# Altium PCB bidirectional_audio_v4.1_ASCII.PcbDoc
Units mm, origin at the board's own origin, x right, y up, seen from the top; angles counter-clockwise.
Board outline 43.45 x 78.94 mm, 4 copper layers (Top Layer, Mid-Layer 1, Mid-Layer 2, Bottom Layer), stack 1.458 mm thick; 106 components, 76 nets, 313 pads, 214 vias.
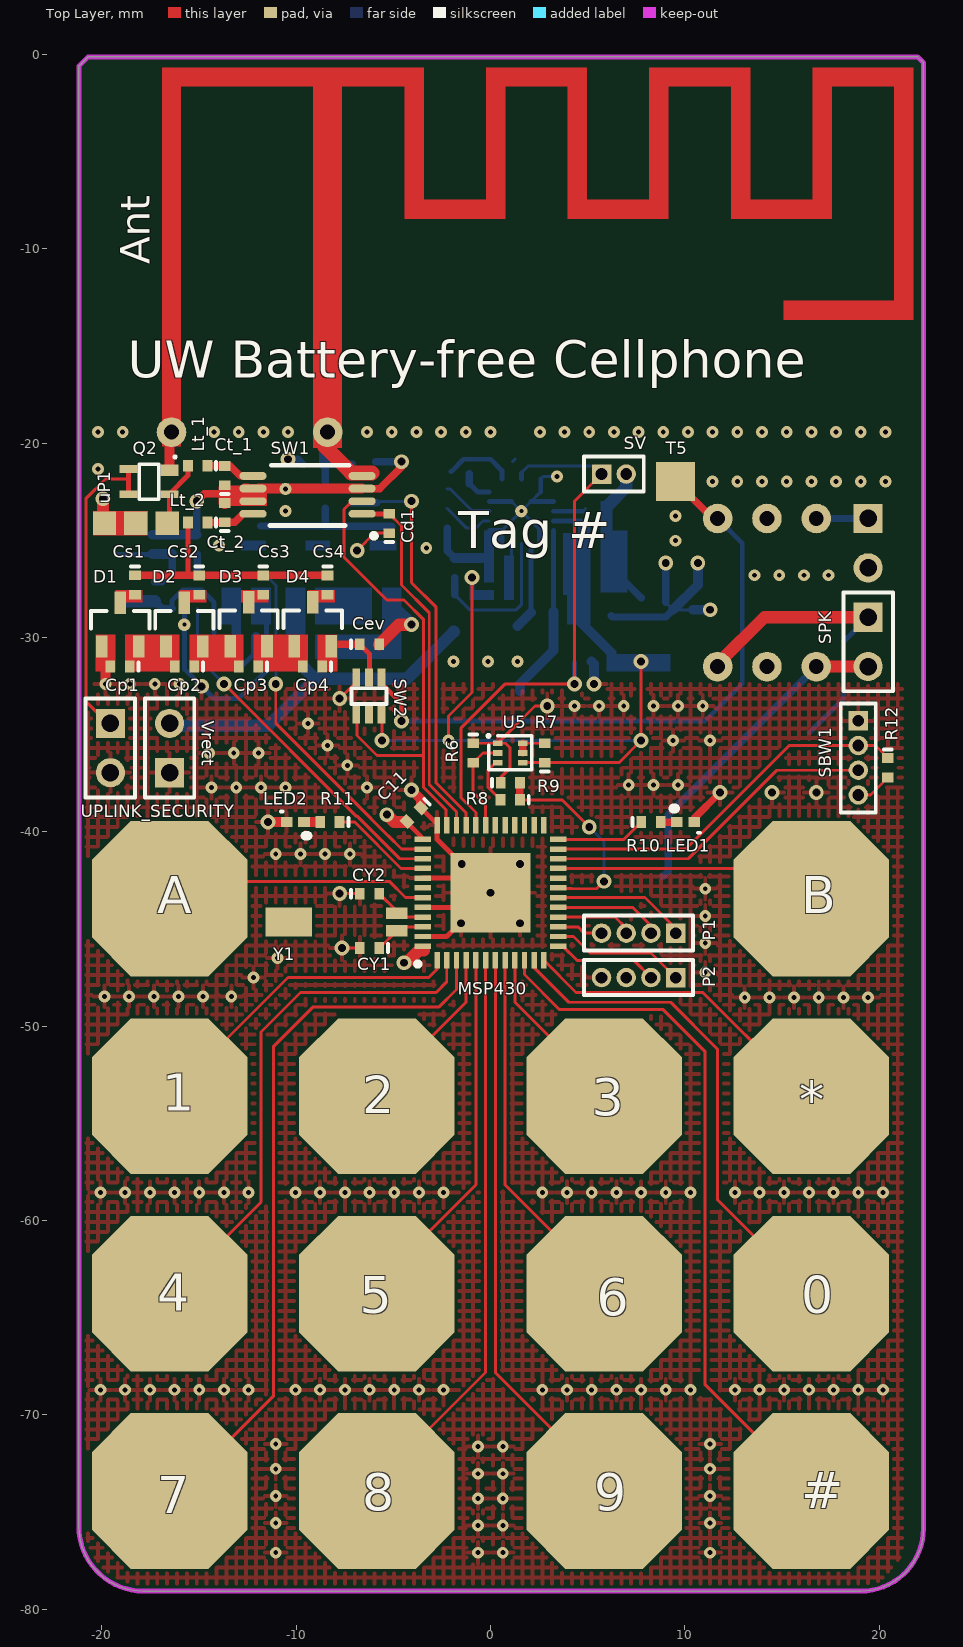
[diagram p0: Top Layer view]
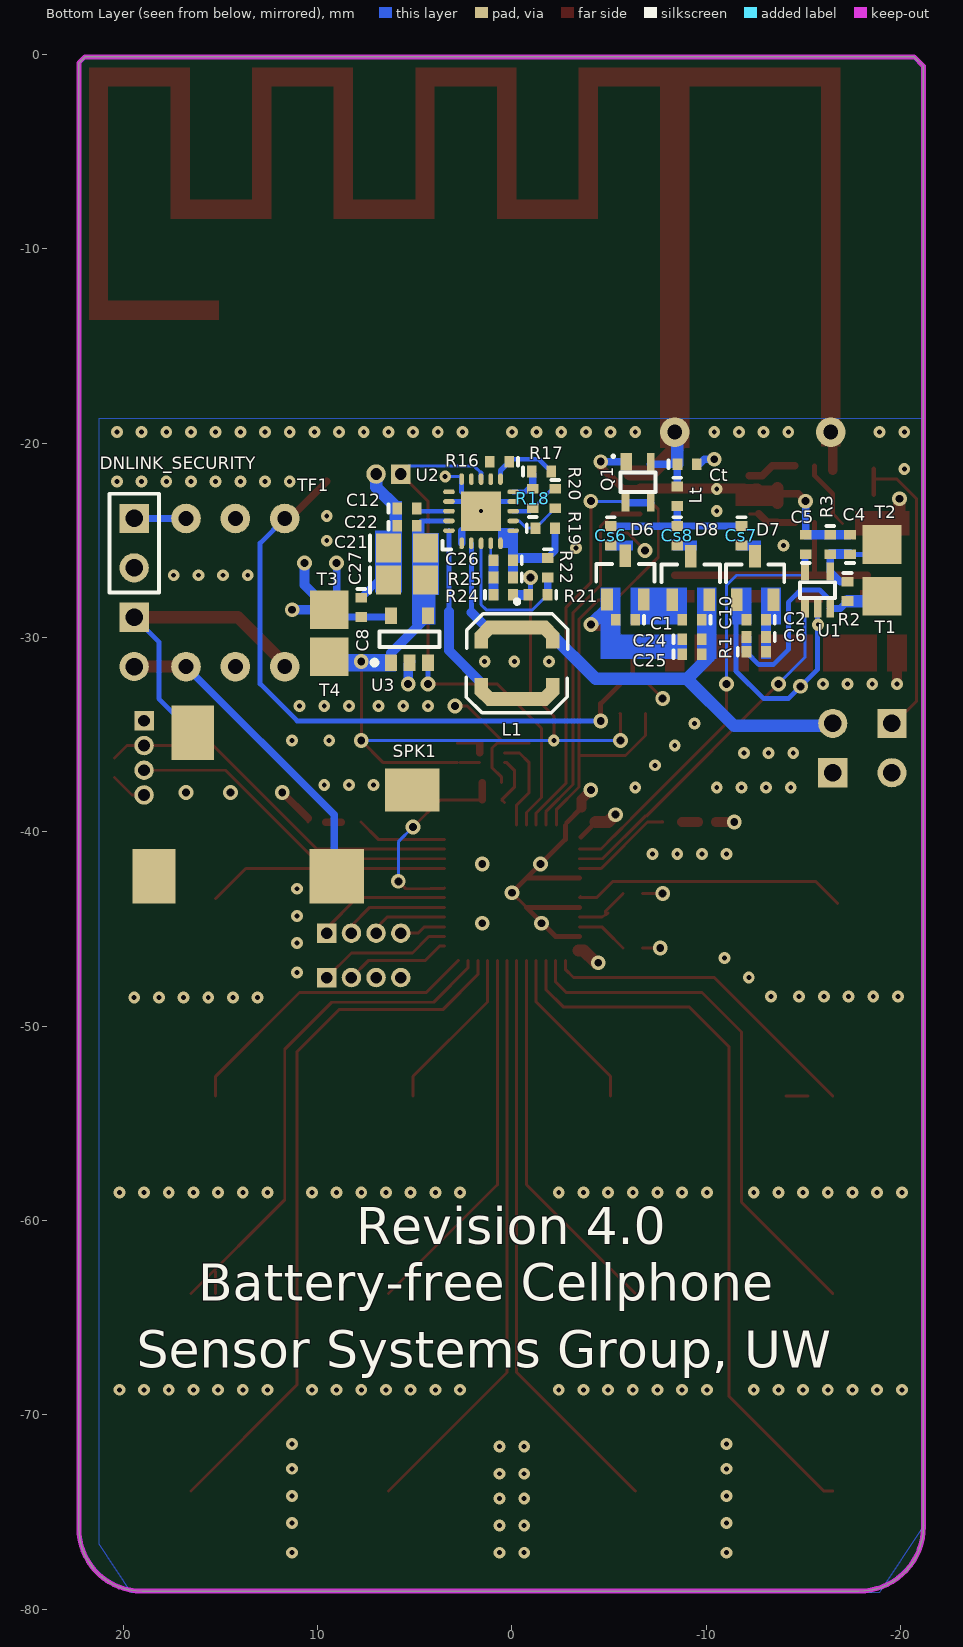
[diagram p1: Bottom Layer view, seen from below]

## Layer stack, top to bottom
Top Layer: signal copper 0.0356
Dielectric: core 0.3023, FR-4, Dk 4.8
Mid-Layer 1: signal copper 0.0356
Dielectric: prepreg 0.7112, FR-4, Dk 4.8
Mid-Layer 2: signal copper 0.0356
Dielectric: core 0.3023, FR-4, Dk 4.8
Bottom Layer: signal copper 0.0356

## Board outline
-21.177,-75.746 -21.177,-0.603 -20.701,-0.127 21.971,-0.127 22.277,-0.433 22.277,-75.838 cw(c19.05,-75.838) 19.05,-79.065 -17.858,-79.065 cw(c-17.858,-75.746)

## Design rules (kind name [scope] priority, off if disabled: settings)
AssemblyTestPointUsage [All] p0: scope1count=1 scope1_0_kind=Board scope1_0_value=Board scope2count=1 scope2_0_kind=Board scope2_0_value=Board commentlength=0
AssemblyTestpoint [All] p0: scope1count=1 scope1_0_kind=Board scope1_0_value=Board scope2count=1 scope2_0_kind=Board scope2_0_value=Board commentlength=0
Clearance "Clearance~Sunstone Circuits" [All] p0: scope1count=1 scope1_0_kind=Board scope1_0_value=Board scope2count=1 scope2_0_kind=Board scope2_0_value=Board commentlength=65 gap=0.152 // Sunstone Circuits Minimum Clearance Rule (MLB~4&6 Layer Designs)
Clearance "Clearance~Sunstone Circuits" [All] p1: gap=0.152 // Sunstone Circuits Minimum Clearance Rule (MLB~4&6 Layer Designs)
ComponentClearance [All] p0: scope1count=1 scope1_0_kind=Board scope1_0_value=Board scope2count=1 scope2_0_kind=Board scope2_0_value=Board commentlength=0 gap=0.254 collisioncheckmode=3
DiffPairsRouting [All] p0: scope1count=1 scope1_0_kind=Board scope1_0_value=Board scope2count=1 scope2_0_kind=Board scope2_0_value=Board commentlength=0
FabricationTestPointUsage [All] p0: scope1count=1 scope1_0_kind=Board scope1_0_value=Board scope2count=1 scope2_0_kind=Board scope2_0_value=Board commentlength=0 valid=0 allowmultiple=FALSE
FabricationTestpoint [All] p0: scope1count=1 scope1_0_kind=Board scope1_0_value=Board scope2count=1 scope2_0_kind=Board scope2_0_value=Board commentlength=0 side=3 testpointundercomponent=TRUE minsize=1.016 maxsize=2.54 preferedsize=1.524 minholesize=0 maxholesize=1.016 preferedholesize=0.813 testpointgrid=0.025
FanoutControl Fanout_BGA [All] p0 off: scope1count=1 scope1_0_kind=Board scope1_0_value=Board scope2count=1 scope2_0_kind=Board scope2_0_value=Board commentlength=69 // Protel DXP Scope 1 Expression Was: IsBGA   Fanout_BGA (Default Rule)
FanoutControl Fanout_LCC [All] p0 off: scope1count=1 scope1_0_kind=Board scope1_0_value=Board scope2count=1 scope2_0_kind=Board scope2_0_value=Board commentlength=69 // Protel DXP Scope 1 Expression Was: IsLCC   Fanout_LCC (Default Rule)
FanoutControl Fanout_SOIC [All] p0 off: scope1count=1 scope1_0_kind=Board scope1_0_value=Board scope2count=1 scope2_0_kind=Board scope2_0_value=Board commentlength=71 // Protel DXP Scope 1 Expression Was: IsSOIC   Fanout_SOIC (Default Rule)
FanoutControl Fanout_Small [All] p0 off: scope1count=1 scope1_0_kind=Board scope1_0_value=Board scope2count=1 scope2_0_kind=Board scope2_0_value=Board commentlength=84 // Protel DXP Scope 1 Expression Was: (CompPinCount < 5)   Fanout_Small (Default Rule)
FanoutControl Fanout_Default [All] p0: scope1count=1 scope1_0_kind=Board scope1_0_value=Board scope2count=1 scope2_0_kind=Board scope2_0_value=Board commentlength=30 // Fanout_Default (Default Rule)
Height [All] p0: scope1count=1 scope1_0_kind=Board scope1_0_value=Board scope2count=1 scope2_0_kind=Board scope2_0_value=Board commentlength=0
HoleSize "HoleSize~Sunstone Circuits" [All] p0: scope1count=1 scope1_0_kind=Board scope1_0_value=Board scope2count=1 scope2_0_kind=Board scope2_0_value=Board commentlength=57 absolutevalues=TRUE maxlimit=6.375 minlimit=0.203 maxpercent=80.000 minpercent=20.000 // Sunstone Circuits Hole Size Rule (MLB~4&6 Layer Designs)
HoleSize Testpoint [All] p0: scope1count=1 scope1_0_kind=Board scope1_0_value=Board scope2count=1 scope2_0_kind=Board scope2_0_value=Board commentlength=0 absolutevalues=TRUE maxlimit=2.54 minlimit=0.025 maxpercent=80.000 minpercent=20.000
HoleSize TestPointUsage [All] p0: scope1count=1 scope1_0_kind=Board scope1_0_value=Board scope2count=1 scope2_0_kind=Board scope2_0_value=Board commentlength=0 absolutevalues=TRUE maxlimit=2.54 minlimit=0.025 maxpercent=80.000 minpercent=20.000
HoleSize "HoleSize~Sunstone Circuits" [All] p1: absolutevalues=TRUE maxlimit=6.375 minlimit=0.203 maxpercent=80.000 minpercent=20.000 // Sunstone Circuits Hole Size Rule (MLB~4&6 Layer Designs)
HoleSize Testpoint [All] p2: absolutevalues=TRUE maxlimit=2.54 minlimit=0.025 maxpercent=80.000 minpercent=20.000
HoleSize TestPointUsage [All] p3: absolutevalues=TRUE maxlimit=2.54 minlimit=0.025 maxpercent=80.000 minpercent=20.000
HoleToHoleClearance [All] p0: scope1count=1 scope1_0_kind=Board scope1_0_value=Board scope2count=1 scope2_0_kind=Board scope2_0_value=Board commentlength=0
LayerPairs [All] p0: scope1count=1 scope1_0_kind=Board scope1_0_value=Board scope2count=1 scope2_0_kind=Board scope2_0_value=Board commentlength=0 enforce=TRUE
MinimumAnnularRing "MinimumAnnularRing~Sunstone Circuits" [All] p0: scope1count=1 scope1_0_kind=Board scope1_0_value=Board scope2count=1 scope2_0_kind=Board scope2_0_value=Board commentlength=63 minimumring=0.178 // Sunstone Circuits Minimum Annular Ring (MLB~4&6 Layer Designs)
MinimumAnnularRing "MinimumAnnularRing~Sunstone Circuits" [All] p1: minimumring=0.178 // Sunstone Circuits Minimum Annular Ring (MLB~4&6 Layer Designs)
MinimumSolderMaskSliver [All] p0: scope1count=1 scope1_0_kind=Board scope1_0_value=Board scope2count=1 scope2_0_kind=Board scope2_0_value=Board commentlength=0
MinimumSolderMaskSliver [All] p1: minsoldermaskwidth=0
NetAntennae [All] p0: scope1count=1 scope1_0_kind=Board scope1_0_value=Board scope2count=1 scope2_0_kind=Board scope2_0_value=Board commentlength=0
PasteMaskExpansion [All] p0: scope1count=1 scope1_0_kind=Board scope1_0_value=Board scope2count=1 scope2_0_kind=Board scope2_0_value=Board commentlength=0 expansion=0
PlaneClearance "PlaneClearance~Sunstone Circuits" [All] p0: scope1count=1 scope1_0_kind=Board scope1_0_value=Board scope2count=1 scope2_0_kind=Board scope2_0_value=Board commentlength=69 clearance=0.305 // Sunstone Circuits Power Plane Clearance Rule (MLB~4&6 Layer Designs)
PlaneClearance "PlaneClearance~Sunstone Circuits" [All] p1: clearance=0.305 // Sunstone Circuits Power Plane Clearance Rule (MLB~4&6 Layer Designs)
PlaneConnect "PlaneConnect~Sunstone Circuits" [All] p0: scope1count=1 scope1_0_kind=Board scope1_0_value=Board scope2count=1 scope2_0_kind=Board scope2_0_value=Board commentlength=67 planeconnectstyle=Relief reliefexpansion=0.254 reliefentries=4 reliefconductorwidth=0.203 reliefairgap=0.254 // Sunstone Circuits Power Plane Connect Rule (MLB~4&6 Layer Designs)
PlaneConnect "PlaneConnect~Sunstone Circuits" [All] p1: planeconnectstyle=Relief reliefexpansion=0.254 reliefentries=4 reliefconductorwidth=0.203 reliefairgap=0.254 // Sunstone Circuits Power Plane Connect Rule (MLB~4&6 Layer Designs)
PolygonConnect "PolygonConnect~Sunstone Circuits" [All] p0: scope1count=1 scope1_0_kind=Board scope1_0_value=Board scope2count=1 scope2_0_kind=Board scope2_0_value=Board commentlength=64 connectstyle=Relief reliefconductorwidth=0.203 reliefentries=4 polygonreliefangle="90 Angle" // Sunstone Circuits Polygon Connect Style (MLB~4&6 Layer Designs)
PolygonConnect "PolygonConnect~Sunstone Circuits" [All] p1: connectstyle=Relief reliefconductorwidth=0.203 reliefentries=4 polygonreliefangle="90 Angle" airgapwidth=0.254 // Sunstone Circuits Polygon Connect Style (MLB~4&6 Layer Designs)
RoutingCorners [All] p0: scope1count=1 scope1_0_kind=Board scope1_0_value=Board scope2count=1 scope2_0_kind=Board scope2_0_value=Board commentlength=0 cornerstyle=45-Degree minsetback=2.54 maxsetback=2.54
RoutingLayers [All] p0: scope1count=1 scope1_0_kind=Board scope1_0_value=Board scope2count=1 scope2_0_kind=Board scope2_0_value=Board commentlength=0 top layer=Automatic mid layer 1=Automatic mid layer 2=Automatic bottom layer=Automatic
RoutingPriority [All] p0: scope1count=1 scope1_0_kind=Board scope1_0_value=Board scope2count=1 scope2_0_kind=Board scope2_0_value=Board commentlength=0
RoutingTopology [All] p0: scope1count=1 scope1_0_kind=Board scope1_0_value=Board scope2count=1 scope2_0_kind=Board scope2_0_value=Board commentlength=0 topology=Shortest
RoutingVias "RoutingVias~Sunstone Circuits" [All] p0: scope1count=1 scope1_0_kind=Board scope1_0_value=Board scope2count=1 scope2_0_kind=Board scope2_0_value=Board commentlength=60 holewidth=0.406 width=0.762 viastyle="Through Hole" minholewidth=0.203 minwidth=0.61 maxholewidth=0.508 maxwidth=1.016 // Sunstone Circuits Routing Vias Rule (MLB~4&6 Layer Designs)
RoutingVias "RoutingVias~Sunstone Circuits" [All] p1: holewidth=0.406 width=0.762 viastyle="Through Hole" minholewidth=0.203 minwidth=0.61 maxholewidth=0.508 maxwidth=1.016 // Sunstone Circuits Routing Vias Rule (MLB~4&6 Layer Designs)
ShortCircuit "ShortCircuit~Sunstone Circuits" [All] p0: scope1count=1 scope1_0_kind=Board scope1_0_value=Board scope2count=1 scope2_0_kind=Board scope2_0_value=Board commentlength=74 allowed=FALSE // Sunstone Circuits Short Circuit Rule~Do Not Allow (MLB~4&6 Layer Designs)
ShortCircuit "ShortCircuit~Sunstone Circuits" [All] p1: allowed=FALSE // Sunstone Circuits Short Circuit Rule~Do Not Allow (MLB~4&6 Layer Designs)
SilkToSilkClearance [All] p0: scope1count=1 scope1_0_kind=Board scope1_0_value=Board scope2count=1 scope2_0_kind=Board scope2_0_value=Board commentlength=0
SilkToSilkClearance [All] p1: silktosilkclearance=0.152
SilkToSolderMaskClearance [All] p0 off: scope1count=1 scope1_0_kind=Board scope1_0_value=Board scope2count=1 scope2_0_kind=Board scope2_0_value=Board commentlength=44 // Protel DXP Scope 1 Expression Was: IsPad
SolderMaskExpansion "SolderMaskExpansion~Sunstone Circuits" [All] p0: scope1count=1 scope1_0_kind=Board scope1_0_value=Board scope2count=1 scope2_0_kind=Board scope2_0_value=Board commentlength=69 expansion=0.076 // Sunstone Circuits Solder Mask Expansion Rule (MLB~4&6 Layer Designs)
SolderMaskExpansion "SolderMaskExpansion~Sunstone Circuits" [All] p1: expansion=0.076 // Sunstone Circuits Solder Mask Expansion Rule (MLB~4&6 Layer Designs)
UnRoutedNet [All] p0: scope1count=1 scope1_0_kind=Board scope1_0_value=Board scope2count=1 scope2_0_kind=Board scope2_0_value=Board commentlength=0
ViasUnderSMD "ViasUnderSMD~Sunstone Circuits" [All] p0: scope1count=1 scope1_0_kind=Board scope1_0_value=Board scope2count=1 scope2_0_kind=Board scope2_0_value=Board commentlength=70 allowed=FALSE // Sunstone Circuits Vias Under SMD~Do Not Allow (MLB~4&6 Layer Designs)
ViasUnderSMD "ViasUnderSMD~Sunstone Circuits" [All] p1: allowed=FALSE // Sunstone Circuits Vias Under SMD~Do Not Allow (MLB~4&6 Layer Designs)
Width "Width~Sunstone Circuits" [All] p0: scope1count=1 scope1_0_kind=Board scope1_0_value=Board scope2count=1 scope2_0_kind=Board scope2_0_value=Board commentlength=61 maxlimit=2.54 minlimit=0.152 preferedwidth=0.254 // Sunstone Circuits Minimum Width Rule (MLB~4&6 Layer Designs)
Width "Width~Sunstone Circuits" [All] p1: maxlimit=2.54 minlimit=0.152 preferedwidth=0.254 // Sunstone Circuits Minimum Width Rule (MLB~4&6 Layer Designs)
22 further rules are at their usual default settings.

## Classes and differential pairs
component class bidirectional_audio_v4.0_AFE: Ant C1 C2 C4 C5 C6 C8 C10 C12 C21 C22 C24 C25 C26 C27 Cd1 Cev Cp1 Cp2 Cp3 Cp4 Cs1 Cs2 Cs3 Cs4 Cs6 Cs7 Cs8 Ct Ct_1 Ct_2 D1 D2 D3 D4 D6 D7 D8 DNLINK_SECURITY L1 Lt Lt_1 Lt_2 Q1 Q2 R1 R2 R3 R16 R17 R18 R19 R20 R21 R22 R24 R25 SPK SPK1 SW1 SW2 T1 T2 T3 T4 T5 TF1 U1 U2 U3 uP1 UPLINK_SECURITY Vrect
component class bidirectional_audio_v4.0_Digital: 0 1 2 3 4 5 6 7 8 9 # * A B C11 CY1 CY2 LED1 LED2 MSP430 P1 P2 R6 R7 R8 R9 R10 R11 R12 SBW1 SV U5 Y1

## Components (designator, comment, footprint, x,y, rotation, side; value= is the part's Value field where it differs from the comment)
0 "Cap touch" CAPTOUCH-8mm#1 13.716,-63.754 r90 top
1 "Cap touch" CAPTOUCH-8mm#2 -16.764,-53.594 r90 top
2 "Cap touch" CAPTOUCH-8mm#3 -6.604,-53.594 r90 top
3 "Cap touch" CAPTOUCH-8mm#4 3.556,-53.594 r90 top
4 "Cap touch" CAPTOUCH-8mm#2 -16.764,-63.754 r90 top
5 "Cap touch" CAPTOUCH-8mm#3 -6.604,-63.754 r90 top
6 "Cap touch" CAPTOUCH-8mm#4 3.556,-63.754 r90 top
7 "Cap touch" CAPTOUCH-8mm#2 -16.764,-73.914 r90 top
8 "Cap touch" CAPTOUCH-8mm#3 -6.604,-73.914 r90 top
9 "Cap touch" CAPTOUCH-8mm#5 3.556,-73.914 r0 top
# "Cap touch" CAPTOUCH-8mm#1 13.716,-73.914 r90 top
* "Cap touch" CAPTOUCH-8mm#1 13.716,-53.594 r90 top
A "Cap touch" CAPTOUCH-8mm#6 -12.7,-44.577 r90 top
Ant "ANT" PIFA_915MHZ -7.182,-20.261 r0 top net-tie
B "Cap touch" CAPTOUCH-8mm#7 11.303,-45.593 r90 top
C1 "Cp_rect" 0402 -5.843,-29.083 r0 bottom
C2 "Cdemod_1" 0402 -12.574,-29.083 r0 bottom
C4 "Cdemod_2" 0402 -17.4,-25.214 r90 bottom
C5 "Decap_rx" 0402 -15.114,-25.214 r90 bottom
C6 "Cdemod_3" 0402 -12.574,-29.972 r0 bottom
C8 "Cout_LDO" 0402 7.747,-28.448 r270 bottom
C10 "Cp_rect" 0402 -9.272,-29.083 r0 bottom
C11 "Cdecap_MSP" 0402 -3.937,-39.116 r225 top
C12 "Cbat" 0402 5.394,-23.36 r180 bottom
C21 "Cstore" 0805-W 5.394,-25.392 r180 bottom
C22 "Cstore" 0402 5.394,-24.249 r180 bottom
C24 "Cin_boost1" 0402 -9.272,-30.099 r180 bottom
C25 "Cin_boost2" 0402 -9.272,-30.861 r180 bottom
C26 "Cref" 0402 0.441,-26.027 r0 bottom
C27 "Cstore2" 0805-W 5.394,-27.043 r180 bottom
Cd1 "Decap_SW" 0402 -5.207,-24.13 r90 top
Cev "Cout_env" 0402 -6.223,-30.353 r0 top
Cp1 "Cp_env" 0402 -19.058,-31.496 r180 top
Cp2 "Cp_env" 0402 -15.748,-31.496 r180 top
Cp3 "Cp_env" 0402 -12.446,-31.496 r180 top
Cp4 "Cp_env" 0402 -9.152,-31.496 r180 top
Cs1 "Cs_env" 0402 -18.288,-27.297 r270 top
Cs2 "Cs_env" 0402 -14.986,-27.305 r270 top
Cs3 "Cs_env" 0402 -11.684,-27.305 r270 top
Cs4 "Cs_env" 0402 -8.382,-27.305 r270 top
Cs6 "Cs_rect" 0402 -5.081,-24.765 r270 bottom
Cs7 "Cs_rx" 0402 -11.812,-24.765 r270 bottom
Cs8 "Cs_rect" 0402 -8.51,-24.765 r270 bottom
Ct "C_Ant_tune" 0402 -9.018,-21.082 r180 bottom
Ct_1 "Cap" 0402 -13.667,-21.671 r90 top
Ct_2 "Cap" 0402 -13.667,-23.576 r90 top
CY1 "Cdecap_MSP" 0402 -6.223,-45.974 r180 top
CY2 "Cdecap_MSP" 0402 -6.223,-43.18 r0 top
D1 "SMS7630-005" "SOT23 - N" -19.05,-29.337 r90 top
D2 "SMS7630-005" "SOT23 - N" -15.748,-29.337 r90 top
D3 "SMS7630-005" "SOT23 - N" -12.446,-29.319 r90 top
D4 "SMS7630-005" "SOT23 - N" -9.144,-29.319 r90 top
D6 "SMS7630-005" "SOT23 - N" -5.843,-26.924 r90 bottom
D7 "SMS7630-005" "SOT23 - N" -12.513,-26.942 r90 bottom
D8 "SMS7630-005" "SOT23 - N" -9.206,-26.942 r90 bottom
DNLINK_SECURITY "Header 2" HDR1X2 19.431,-23.876 r270 bottom
L1 "Ind_LPS4018" LPS4018 -0.382,-31.115 r180 bottom
LED1 "LED" "Diode - 0402" 10.033,-39.497 r180 top
LED2 "LED" "Diode - 0402" -10.041,-39.497 r0 top
Lt "L_Ant_tune" 0402 -8.51,-22.733 r270 bottom
Lt_1 "Ind" 0402 -15.064,-21.163 r180 top
Lt_2 "Ind" 0402 -15.064,-24.084 r180 top
MSP430 "MSP430 Wolverine 48-Pin" MSP_QFN48_RGZ_PAD0 0,-43.134 r90 top
P1 "MHDR1X4" MHDR1X4 9.525,-45.212 r180 top
P2 "MHDR1X4" MHDR1X4 9.525,-47.498 r180 top
Q1 "BF1101WR" SOT343R -6.478,-21.971 r0 bottom
Q2 "BF1101WR" SOT343R -17.526,-21.971 r90 top
R1 "Res_demod1" 0402 -12.574,-30.734 r180 bottom
R2 "Res_demod2" 0402 -17.273,-27.627 r270 bottom
R3 "Res_demod3" 0402 -16.384,-25.214 r270 bottom
R6 "Res_HSS" 0402 -0.889,-35.941 r270 top
R7 "Res_HSS" 0402 2.794,-35.941 r90 top
R8 "Res_HSS" 0402 1.016,-38.354 r180 top
R9 "Res_HSS" 0402 1.024,-37.465 r0 top
R10 "Res_LED" 0402 8.263,-39.497 r0 top
R11 "Res_LED" 0402 -8.263,-39.497 r180 top
R12 "Res_flash" 0402 20.447,-36.703 r270 top
R16 "Rok1" 0402 0.634,-20.955 r0 bottom
R17 "Rok2" 0402 -1.525,-21.463 r180 bottom
R18 "Rok3" 0402 -1.083,-22.852 r90 bottom
R19 "Rov1" 0402 -1.718,-24.376 r180 bottom
R20 "Rov2" 0402 -2.226,-22.852 r270 bottom
R21 "R_80%" 0402 -1.337,-27.805 r0 bottom
R22 "R_50%" 0402 -1.845,-26.408 r270 bottom
R24 "Res_MPPTfixed" 0402 0.441,-27.805 r180 bottom
R25 "Res_MPPTfixed" 0402 0.441,-26.916 r0 bottom
SBW1 "MHDR1X4" MHDR1X4 18.923,-34.29 r270 top
SPK "Header 2" HDR1X2 19.431,-28.956 r270 top
SPK1 "Headphone jack" CONN_JACK 18.415,-42.291 r180 bottom
SV "MHDR1X2" MHDR1X2 5.715,-21.59 r0 top
SW1 "ADG919" MSOP_8pin -9.476,-22.687 r180 top
SW2 "ADG841" SC70-6 -6.223,-33.02 r180 top
T1 "Test Point SMT" SMT_TESTPOINT_2MM -19.051,-27.881 r180 bottom
T2 "Test Point SMT" SMT_TESTPOINT_2MM -19.051,-25.214 r180 bottom
T3 "Test Point SMT" SMT_TESTPOINT_2MM 9.398,-28.575 r0 bottom
T4 "Test Point SMT" SMT_TESTPOINT_2MM 9.398,-30.988 r0 bottom
T5 "Test Point SMT" SMT_TESTPOINT_2MM 9.525,-21.971 r0 top
TF1 "Audio_TF" AUDIO_TF 16.764,-23.876 r270 bottom
U1 "Comparator" SC70-5 -15.734,-27.561 r180 bottom
U2 "BQ25570" BQ25570 1.585,-23.503 r90 bottom
U3 "TPS780270200DDCT" TI-DDC5_L 5.267,-30.091 r90 bottom
U5 "SI1016X" "SC-89-6 Vishay" 1.016,-35.941 r0 top
uP1 "Electret Microphone" UP_23024 -18.247,-24.13 r0 top
UPLINK_SECURITY "Header 2" HDR1X2 -19.558,-34.417 r270 top
Vrect "Header 2" HDR1X2 -16.51,-36.957 r90 top
Y1 "32khz_tuning_fork_crystal" CRYSTAL_TUNING_FORK_32KHZ -7.276,-44.635 r0 top

## Footprints (in the part's own frame and the unit in brackets; to place one, negate y for a bottom-side part, rotate by r counter-clockwise, add the part's x,y. Pads: shape width x height; smd on the part's side, far side on the other; paste and mask are expansions set on the pad)
0402 [mm] "Surface Mount; Body 1 x 0.5 mm (LxW typ)"
  rect 0.5x0.6 smd: 1(-0.5,0) 2(0.5,0)
  silkscreen extent -0.95,-0.2 -0.95,0.2
0805-W [mm] "Surface Mount - Wide; Body 2.0 x 1.25 mm (LxW typ)"
  rect 1.3x1.5 smd: 1(-0.95,0) 2(0.95,0)
  silkscreen extent -1.9,-0.65 -1.9,0.65
AUDIO_TF [mil] "Audio Transformer Triad"
  round 60 hole 30: 1(0,0) 2(0,100) 3(0,200) 4(300,200) 5(300,100) 6(300,0)
BQ25570 [mm] "Boost Charger"
  oval 0.6x0.24 smd paste-0.025 mask+0.07: 1(-1.65,1) 2(-1.65,0.5) 3(-1.65,0) 4(-1.65,-0.5) 5(-1.65,-1) 11(1.65,-1) 12(1.65,-0.5) 13(1.65,0) 14(1.65,0.5) 15(1.65,1)
  oval 0.24x0.6 smd paste-0.025 mask+0.07: 6(-1,-1.65) 7(-0.5,-1.65) 8(0,-1.65) 9(0.5,-1.65) 10(1,-1.65) 16(1,1.65) 17(0.5,1.65) 18(0,1.65) 19(-0.5,1.65) 20(-1,1.65)
  round 0.635 hole 0.203: 21(0,0)
  rect 2.05x2.05 smd: 21(0,0)
  silkscreen extent -1.97,1.54 -1.54,1.98
CAPTOUCH-8mm#1 [mil]
  oct 315x315 smd: 1(0,-110)
CAPTOUCH-8mm#2 [mil]
  oct 315x315 smd: 1(0,-10)
CAPTOUCH-8mm#3 [mil]
  oct 315x315 smd: 1(0,-30)
CAPTOUCH-8mm#4 [mil]
  oct 315x315 smd: 1(0,-90)
CAPTOUCH-8mm#5 [mil]
  oct 315x315 smd: 1(90,0)
CAPTOUCH-8mm#6 [mil]
  oct 315x315 smd: 1(45,150)
CAPTOUCH-8mm#7 [mil]
  oct 315x315 smd: 1(85,-205)
CONN_JACK [mm] "PCB footprint for the headphone jack"
  rect 2.2x2.8 smd: 1(0,0) 3(2,7.4)
  rect 2.8x2.8 smd: 2(9.4,0)
  rect 2.8x2.2 smd: 4(13.3,4.45)
CRYSTAL_TUNING_FORK_32KHZ [mm]
  rect 1.1x0.6 smd: 1(2.45,0.45) 2(2.45,-0.45)
  rect 2.4x1.5 smd: ""(-3.1,0)
"Diode - 0402" [mm] "Diode: Body 1.6 x 0.8 mm (LxW typ)"
  rect 0.6x0.5 smd: 1(0.45,0) 2(-0.45,0)
  silkscreen extent -0.75,-0.7 0.63,0.55
HDR1X2 [mm] "Connector; Header; 2 Position"
  rect 1.5x1.5 hole 0.9: 1(0,0)
  round 1.5 hole 0.9: 2(2.54,0)
  silkscreen extent -1.27,-1.27 3.81,1.27
LPS4018 [mil] "Inductor"
  rect 28x31.5 smd: 1(-77.03,37.61) 1(67.97,37.61) 2(-77.03,-54.39) 2(67.97,-54.39)
  rect 35.5x28 smd rot 45: 1(-68.53,55.61) 2(59.47,-72.39)
  rect 123x28 smd: 1(-4.53,64.11) 2(-4.53,-80.89)
  rect 35.5x28 smd rot 135: 1(59.47,55.61) 2(-68.03,-72.89)
  silkscreen extent -107,-109 98,120
MHDR1X2 [mm] "Connector; Header; 2 Position"
  rect 1x1 hole 0.6: 1(0,0)
  round 1 hole 0.6: 2(1.27,0)
  silkscreen extent -0.9,-0.9 2.17,0.9
MHDR1X4 [mm] "Connector; Header; 4 Position"
  rect 1x1 hole 0.6: 1(0,0)
  round 1 hole 0.6: 2(1.27,0) 3(2.54,0) 4(3.81,0)
  silkscreen extent -0.9,-0.9 4.71,0.9
MSOP_8pin [mm]
  oval 1.4x0.4 smd: 1(-2.872,0.95) 2(-2.872,0.3) 3(-2.872,-0.35) 4(-2.87,-1.001) 5(2.745,-1) 6(2.745,-0.35) 7(2.745,0.3) 8(2.745,0.95)
  silkscreen extent -3.6,-1.55 1.88,2.21
MSP_QFN48_RGZ_PAD0 [mm]
  rect 4.1x4.1 smd: 0(0,0)
  rect 0.85x0.28 smd: 1(-3.475,2.75) 2(-3.475,2.25) 3(-3.475,1.75) 4(-3.475,1.25) 5(-3.475,0.75) 6(-3.475,0.25) 7(-3.475,-0.25) 8(-3.475,-0.75) 9(-3.475,-1.25) 10(-3.475,-1.75) 11(-3.475,-2.25) 12(-3.475,-2.75) 25(3.475,-2.75) 26(3.475,-2.25) 27(3.475,-1.75) 28(3.475,-1.25) 29(3.475,-0.75) 30(3.475,-0.25) 31(3.475,0.25) 32(3.475,0.75) 33(3.475,1.25) 34(3.475,1.75) 35(3.475,2.25) 36(3.475,2.75)
  rect 0.28x0.85 smd: 13(-2.75,-3.475) 14(-2.25,-3.475) 15(-1.75,-3.475) 16(-1.25,-3.475) 17(-0.75,-3.475) 18(-0.25,-3.475) 19(0.25,-3.475) 20(0.75,-3.475) 21(1.25,-3.475) 22(1.75,-3.475) 23(2.25,-3.475) 24(2.75,-3.475) 37(2.75,3.475) 38(2.25,3.475) 39(1.75,3.475) 40(1.25,3.475) 41(0.75,3.475) 42(0.25,3.475) 43(-0.25,3.475) 44(-0.75,3.475) 45(-1.25,3.475) 46(-1.75,3.475) 47(-2.25,3.475) 48(-2.75,3.475)
  silkscreen extent -3.78,3.63 -3.55,3.85
PIFA_915MHZ [mil]
  round 60 hole 30: 1(-47.24,32.68) 2(-363.39,32.68)
  Top Layer region: -17.72,732.28 147.64,732.28 147.64,771.65 -17.72,771.65
  Top Layer region: 147.64,771.65 108.27,771.65 108.27,503.94 147.64,503.94
  Top Layer region: 108.27,464.57 312.99,464.57 312.99,503.94 108.27,503.94
  Top Layer region: 273.62,503.94 312.99,503.94 312.99,771.65 273.62,771.65
  Top Layer region: 273.62,732.28 478.35,732.28 478.35,771.65 273.62,771.65
  Top Layer region: 438.98,503.94 478.35,503.94 478.35,771.65 438.98,771.65
  Top Layer region: 438.98,464.57 643.7,464.57 643.7,503.94 438.98,503.94
  Top Layer region: 604.33,503.94 643.7,503.94 643.7,771.65 604.33,771.65
  Top Layer region: 604.33,732.28 809.06,732.28 809.06,771.65 604.33,771.65
  Top Layer region: 769.68,503.94 809.06,503.94 809.06,771.65 769.68,771.65
  Top Layer region: 769.68,464.57 974.41,464.57 974.41,503.94 769.68,503.94
  Top Layer region: 935.04,503.94 974.41,503.94 974.41,771.65 935.04,771.65
  Top Layer region: 875.98,259.84 1100.39,259.84 1100.39,299.21 875.98,299.21
  Top Layer region: 1100.39,259.84 1139.76,259.84 1139.76,732.28 1100.39,732.28
  Top Layer region: 935.04,732.28 1139.76,732.28 1139.76,771.65 935.04,771.65
  Top Layer region: -76.77,0 -17.72,0 -17.72,732.28 -76.77,732.28
  Top Layer region: -343.7,732.28 -17.72,732.28 -17.72,771.65 -343.7,771.65
  Top Layer region: -383.07,3.94 -343.7,3.94 -343.7,771.65 -383.07,771.65
SC70-5 [mm] "SC70-5"
  rect 0.4x0.92 smd: 1(-0.65,-0.95) 2(0,-0.95) 3(0.65,-0.95) 4(0.65,0.95) 5(-0.65,0.95)
  silkscreen extent -0.9,-0.4 0.9,0.4
SC70-6 [mm] "Audio Switch"
  rect 0.4x0.92 smd: 1(-0.616,-0.957) 2(0.034,-0.957) 3(0.684,-0.957) 4(0.684,0.943) 5(0.034,0.943) 6(-0.616,0.943)
  silkscreen extent -0.87,-0.41 0.93,0.39
"SC-89-6 Vishay" [mm]
  rect 0.478x0.3 smd: 1(-0.638,0.5) 2(-0.638,0) 3(-0.638,-0.5) 4(0.638,-0.5) 5(0.638,0) 6(0.638,0.5)
  silkscreen extent -1.15,-0.87 1.11,0.91
SMT_TESTPOINT_2MM [mm]
  rect 2x2 smd: 1(0,0)
"SOT23 - N" [mm] "SOT23, 3-Leads, Body 2.9x1.3mm, Pitch 0.95mm, Lead Span 2.3mm - Reverse Pinning, IPC Medium Density"
  rect 1.15x0.6 smd: 1(-1.125,0.95) 2(-1.125,-0.95) 3(1.125,0)
  silkscreen extent -0.2,-1.5 0.7,1.5
SOT343R [mm] "SOT343R - Package for BF1101WR"
  rect 0.6x0.92 smd: 1(0.584,-1.016)
  rect 0.4x0.92 smd: 2(-0.664,-1.007) 3(-0.664,1.093) 3(0.636,1.093)
  silkscreen extent -0.91,-1.3 1.27,0.54
TI-DDC5_L [mm] "SOT23, 5-Leads, Body 2.9x1.6mm, Pitch 0.95mm, IPC High Density"
  rect 0.85x0.6 smd: 1(-1.2,0.95) 2(-1.2,0) 3(-1.2,-0.95) 4(1.2,-0.95) 5(1.2,0.95)
  silkscreen extent -1.32,-1.55 0.4,1.93
UP_23024 [mm]
  rect 1.2x1.2 smd: 1(-1.61,0.01) 2(0,0) 3(1.61,0)

## Part data
0 1 2 3 4 5 6 7 8 9 # * A B: "Cap Touch Buttons"
C1 C2 C4 C5 C6 C8 C10 C11 C12 C21 C22 C24 C25 C26 C27 Cev Cp1 Cp2 Cp3 Cp4 Cs1 Cs2 Cs3 Cs4 Cs6 Cs7 Cs8 Ct CY1 CY2: library part Cap, "Ceramic Capacitor (Surface Mount)"
Cd1: library part Ceramic_Chip_Capacitor, "Ceramic Capacitor - Standard"
Ct_1 Ct_2: "Ceramic Capacitor (Surface Mount)"
D1 D2 D3 D4 D6 D7 D8: "Agilent Schottky Diode, Two in Series, Small Package SOT-323"
DNLINK_SECURITY SPK SV UPLINK_SECURITY Vrect: "Header, 2-Pin"
L1 Lt_1 Lt_2: "Inductor (Surface Mount)"
LED1 LED2: library part "Diode - picoLED", "Typical RED, GREEN, YELLOW, AMBER GaAs LED"
Lt: library part Ind, "Inductor (Surface Mount)"
MSP430: library part MSP430FR596X_586X_RGZ, "16-bit FRAM MCU"
P1 P2 SBW1: "Header, 4-Pin"
Q1 Q2: "N-Channel Dual-Gate Mos-Fets MOSFET, SOT343R"
R1 R2 R3 R6 R7 R8 R9 R10 R11 R12 R16 R17 R18 R19 R20 R21 R22 R24 R25: library part Res, "Chip Resistor (Surface Mount)"
SPK1: library part CONN_JACK
SW1: "RF 2:1 MUX/SPDT Reflective"
SW2: "Audio Switch"
T1 T2 T3 T4 T5: "Test Point, Flat Pad"
TF1: "Audio Transformer by Triad"
U1: library part NCS2200, "Comparator: On Semi 10uA Comparator"
U2: "Boost Charger"
U3: library part CMP-0394-01119-1, "Single Output LDO, 150 mA, Adjustable 1.22 to 5.25 V Output, 2.2 to 5.5 V Input, with 500 nA Quiescent Current, 5-pin SOT (DDC), -40 to 125 degC, Green (RoHS & no Sb/Br)"
U5: "NMOS and PMOS array"
uP1: library part UP_Knowles_23024
Y1: "32 khz crystal"

## Via types
v1: diameter 0.61, hole 0.254, Top Layer to Bottom Layer, tented both sides, 174 vias
v2: diameter 0.762, hole 0.406, Top Layer to Bottom Layer, tented both sides, 24 vias
v3: diameter 0.762, hole 0.406, Top Layer to Bottom Layer, 14 vias
v4: diameter 0.635, hole 0.203, Top Layer to Bottom Layer, tented both sides, 1 vias
v5: diameter 0.61, hole 0.254, Top Layer to Bottom Layer, 1 vias

## Nets (pads, with @x,y where several pads share a name; then routed paths per layer and width w, separated by ;. In a path a pad name is that pad's centre, name@x,y a point inside that pad or via, vN(x,y) a via of type N, cw(c..) or ccw(c..) an arc to the next point about the centre after c; other vN are vias at no path point)
AN_EN: Cd1.2 MSP430.34 SW1.1 | length 18.9
  Top Layer w0.152: Cd1.2@-5.208,-23.637 Cd1.2@-5.207,-23.638 ; Cd1.2 -4.572,-24.265 -4.572,-27.305 -3.151,-28.726 -3.151,-37.566 -1.75,-38.967 MSP430.34
  Top Layer w0.254: SW1.1 Cd1.2@-5.208,-23.637
ANT: Ant.1 Ct.1 Lt.1 Q1.2 SW1.4 | length 8.2
  Top Layer w0.762: Ant.1@-8.509,-19.351 -8.509,-20.193 -7.17,-21.532 SW1.4@-6.096,-21.532
  Bottom Layer w0.152: Ct.1 Ct.1@-8.51,-21.082 ; Ant.1@-8.518,-19.36 Ant.1@-8.509,-19.351
  Bottom Layer w0.381: Lt.1 Ct.1@-8.51,-21.082 ; Ct.1@-8.51,-20.963 Ct.1@-8.51,-21.082 ; Q1.2@-7.113,-21.082 Ct.1@-8.51,-21.082
  Bottom Layer w0.635: Ct.1 Ant.1@-8.518,-19.36
AUDIO_NEG: SPK1.2 SPK.2 TF1.6 | length 16.7
  Top Layer w0.635: TF1.6 SPK.2
  Bottom Layer w0.381: SPK1.2@8.89,-42.291 9.144,-42.037 9.144,-39.116 TF1.6
AUDIO_OUT: SW2.1 T5.1 TF1.3 | length 32.8
  Top Layer w0.152: TF1.3@11.43,-23.876 TF1.3
  Top Layer w0.254: SW2.1@-5.571,-32.157 -5.571,-32.402 -4.572,-33.401 v3(-4.572,-34.29)
  Top Layer w0.381: T5.1 TF1.3@11.43,-23.876
  Bottom Layer w0.254: v3(-4.572,-34.29) -3.429,-34.29 11.049,-34.29 12.954,-32.385 12.954,-25.146 TF1.3
AUDIO_POS: SPK1.3 SPK.1 TF1.4 | length 16
  Top Layer w0.635: TF1.4@11.811,-31.496 11.811,-31.242 14.097,-28.956 SPK.1
  Bottom Layer w0.254: SPK1.3 18.161,-33.145 18.161,-30.226 SPK.1
DMD_N: C4.1 R2.1 R3.2 T2.1 U1.4 | length 5.9
  Bottom Layer w0.254: T2.1@-19.305,-25.722 -16.392,-25.722 R3.2
  Bottom Layer w0.381: R2.1 -16.9,-27.127 U1.4 R3.2
  Bottom Layer w0.508: C4.1 R3.2
DNLINK_SR: DNLINK_SECURITY.1 TF1.1 | length 2.5
  Bottom Layer w0.381: TF1.1@16.891,-23.876 19.193,-23.876 DNLINK_SECURITY.1@19.312,-23.757
GND: Ant.2 C1.2 C2.2 C4.2 C5.2 C8.1 C11.1 C12.1 C21.1 C22.1 C24.1 C25.1 C26.1 C27.1 Cd1.1 Cev.2 Cp1.2 Ct.2 Ct_1.1 Ct_2.2 CY1.2 CY2.1 D1.1 D6.1 D7.1 DNLINK_SECURITY.2 LED1.2 LED2.2 MSP430.0 MSP430.36 MSP430.41 MSP430.44 MSP430.47 P2.3 P2.4 Q1.1 Q2.1 R3.1 R6.1 R9.1 R16.2 R19.2 R22.1 R25.1 SBW1.1 SV.2 SW1.3 SW1.6 SW1.7 SW2.3 U1.2 U2.1 U2.5 U2.6 U2.9 U2.15 U2.17 U2.21 U3.2 U5.1 uP1.1 uP1.2 UPLINK_SECURITY.2 Vrect.1 | length 93.6
  Top Layer w0.152: D1.1 D1.1@-19.812,-30.65 ; uP1.1@-19.94,-24.037 uP1.1 ; Ant.2@-16.637,-19.588 Ant.2@-16.51,-19.461 ; Ant.2@-16.459,-19.41 Ant.2@-16.459,-19.351 ; v2(-15.114,-22.987) v2@-14.986,-22.987 ; -13.667,-22.606 -12.319,-22.606 ; LED2.2@-10.493,-39.495 LED2.2 ; v2(-7.76,-43.178) -6.725,-43.178 CY2.1 ; v2(-7.76,-33.145) -6.871,-32.256 SW2.3@-6.871,-32.157 ; v2(-7.633,-45.972) -7.631,-45.974 CY1.2 ; v2(-6.858,-25.527) -5.961,-24.63 Cd1.1 ; v2@-4.191,-37.973 v2@-3.937,-37.973 ; MSP430.36@-2.841,-39.532 MSP430.36@-2.841,-39.505 ; R6.1 U5.1 ; MSP430.0@-0.75,-43.884 v3(0,-43.134) MSP430.0@-0.75,-42.384 ; R9.1 0.524,-37.195 1.016,-36.703 1.016,-35.687 0.77,-35.441 U5.1 ; v2(2.921,-33.528) 2.291,-33.528 U5.1 ; LED1.2 LED1.2@10.483,-39.301
  Top Layer w0.254: C11.1 MSP430.36@-2.841,-39.505 ; MSP430.47 -2.25,-45.384 -0.75,-43.884 MSP430.44 ; MSP430.41 MSP430.0@-0.75,-42.384 ; MSP430.36 -2.75,-40.384 v3(0,-43.134)
  Top Layer w0.381: v2(-15.114,-22.987) -14.733,-22.606 -13.667,-22.606 ; SW1.3 -5.7,-22.337 -4.573,-21.21 v2(-4.573,-20.955) ; LED1.2@10.483,-39.301 v2(11.811,-37.973)
  Top Layer w0.508: v1(-19.812,-32.385) D1.1@-19.812,-30.65 ; Q2.1 Ant.2@-16.51,-19.461 ; SW1.6@-12.651,-22.337 -12.504,-22.337 -12.494,-22.347 -11.947,-22.347 -11.936,-22.337 SW1.3 ; v2(-11.443,-39.495) LED2.2@-10.493,-39.495 ; v2@-3.937,-37.973 -3.583,-38.327 C11.1
  Top Layer w0.635: uP1.1@-19.94,-24.037 v2(-19.94,-22.86) ; Ct_2.2 -13.667,-22.606 Ct_1.1@-13.667,-22.306 ; Cev.2 -4.707,-29.337 v2(-4.065,-29.337)
  Bottom Layer w0.152: -15.749,-24.714 -15.734,-24.729 ; C5.2 C5.2@-15.062,-24.765 ; D7.1 D7.1@-11.528,-28.102 ; Ct.2@-9.652,-21.082 Ct.2 ; D6.1@-5.081,-28.237 -4.987,-28.143 D6.1@-4.987,-28.415 ; C26.1@-0.178,-25.908 C26.1 ; U2.21@0.585,-24.503 U2.21@1.585,-23.503 ; U2.21@1.085,-23.003 U2.21@1.585,-23.503 ; R16.2 R16.2@1.27,-20.819 ; U2.21@2.585,-24.503 U2.21@1.585,-23.503 ; U2.21@2.585,-22.503 2.085,-23.003 U2.21@1.585,-23.503 ; U2.15 2.721,-21.717 v1(3.429,-21.717) ; C12.1 C12.1@5.968,-23.286 ; C27.1 C27.1@6.842,-27.043
  Bottom Layer w0.254: U1.2 -15.734,-31.637 v2(-14.859,-32.512) -14.224,-33.147 -12.954,-33.147 -11.528,-31.721 D7.1@-11.528,-28.102 ; U2.6 0.585,-24.503 U2.5 ; U2.9 U2.21@1.085,-23.003 ; U2.21@2.085,-23.003 U2.17 ; U2.21@2.585,-22.503 U2.15
  Bottom Layer w0.381: C5.2 v2(-15.114,-22.987) ; v2(-10.414,-20.828) -9.906,-20.828 Ct.2@-9.652,-21.082 ; Q1.1 v2(-4.573,-20.955) ; R19.2 -2.218,-25.535 R22.1 ; U2.1 U2.21@2.585,-24.503 ; C27.1@6.842,-27.043 C8.1
  Bottom Layer w0.508: C4.2 R3.1 -15.749,-24.714 C5.2 ; R22.1 C26.1@-0.178,-25.908 ; U3.2@5.206,-31.242 5.333,-31.369 v2@5.333,-32.258
  Bottom Layer w0.635: D6.1@-4.987,-28.415 v2(-4.065,-29.337) ; C12.1@5.968,-23.286 6.985,-22.269 SV.2
  other v1: -11.049,-77.089 -0.635,-77.089 0.635,-77.089 11.303,-77.089 -0.635,-75.692 0.635,-75.692 -11.049,-75.565 11.303,-75.565 -0.635,-74.295 0.635,-74.295 -11.049,-74.168 11.303,-74.168 -0.635,-73.025 0.635,-73.025 -11.049,-72.771 11.303,-72.771 -0.635,-71.628 0.635,-71.628 -11.049,-71.501 11.303,-71.501 -20.066,-68.707 -18.796,-68.707 -17.526,-68.707 -16.256,-68.707 -14.986,-68.707 -13.716,-68.707 -12.446,-68.707 -10.033,-68.707 -8.763,-68.707 -7.493,-68.707 -6.223,-68.707 -4.953,-68.707 -3.683,-68.707 -2.413,-68.707 2.667,-68.707 3.937,-68.707 5.207,-68.707 6.477,-68.707 7.747,-68.707 9.017,-68.707 10.287,-68.707 12.573,-68.707 13.843,-68.707 15.113,-68.707 16.383,-68.707 17.653,-68.707 18.923,-68.707 20.193,-68.707 -20.066,-58.547 -18.796,-58.547 -17.526,-58.547 -16.256,-58.547 -14.986,-58.547 -13.716,-58.547 -12.446,-58.547 -10.033,-58.547 -8.763,-58.547 -7.493,-58.547 -6.223,-58.547 -4.953,-58.547 -3.683,-58.547 -2.413,-58.547 2.667,-58.547 3.937,-58.547 5.207,-58.547 6.477,-58.547 7.747,-58.547 9.017,-58.547 10.287,-58.547 12.573,-58.547 13.843,-58.547 15.113,-58.547 16.383,-58.547 17.653,-58.547 18.923,-58.547 20.193,-58.547 13.081,-48.514 14.351,-48.514 15.621,-48.514 16.891,-48.514 18.161,-48.514 19.431,-48.514 -19.863,-48.463 -18.593,-48.463 -17.323,-48.463 -16.053,-48.463 -14.783,-48.463 -13.335,-48.463 -12.192,-47.498 11.049,-47.244 -10.95,-46.482 11.049,-45.72 11.049,-44.323 11.049,-42.926 -11.049,-41.148 -9.779,-41.148 -8.509,-41.148 -7.239,-41.148 -14.351,-37.719 -13.081,-37.719 -11.811,-37.719 -10.541,-37.719 -6.35,-37.719 7.112,-37.592 8.382,-37.592 9.652,-37.592 -7.366,-36.576 -14.478,-35.941 -13.208,-35.941 -11.938,-35.941 -8.382,-35.56 9.398,-35.306 11.303,-35.306 -9.398,-34.417 4.318,-33.528 5.588,-33.528 6.858,-33.528 8.382,-33.528 9.652,-33.528 10.922,-33.528 -18.542,-32.385 -17.272,-32.385 -16.002,-32.385 -1.905,-31.242 -0.127,-31.242 1.397,-31.242 13.589,-26.797 14.859,-26.797 16.129,-26.797 17.399,-26.797 -3.302,-25.4 -13.97,-25.273 9.525,-25.019 9.525,-23.749 -10.541,-23.495 -10.541,-22.352 11.43,-21.971 12.7,-21.971 13.97,-21.971 15.24,-21.971 16.51,-21.971 17.78,-21.971 19.05,-21.971 20.32,-21.971 -20.193,-21.336 -20.193,-19.431 -18.923,-19.431 -14.224,-19.431 -12.954,-19.431 -11.684,-19.431 -10.414,-19.431 -6.35,-19.431 -5.08,-19.431 -3.81,-19.431 -2.54,-19.431 -1.27,-19.431 0,-19.431 2.54,-19.431 3.81,-19.431 5.08,-19.431 6.35,-19.431 7.62,-19.431 8.89,-19.431 10.16,-19.431 11.43,-19.431 12.7,-19.431 13.97,-19.431 15.24,-19.431 16.51,-19.431 17.78,-19.431 19.05,-19.431 20.32,-19.431
  other v2: -1.524,-44.704 1.524,-44.704 -1.478,-41.656 1.524,-41.656 14.478,-37.973 16.764,-37.973 -4.064,-37.846 5.334,-32.385
  other v4: -15.748,-29.337
LED1: MSP430.24 R10.1 | length 4.7
  Top Layer w0.152: MSP430.24 6.876,-40.384 R10.1
LED2: MSP430.40 R11.1 | length 5.3
  Top Layer w0.152: R11.1@-7.737,-39.471 R11.1 -6.985,-39.497 -4.598,-41.884 MSP430.40
MEAS_EN: MSP430.31 R6.2 U5.2 | length 5
  Top Layer w0.152: MSP430.31 -0.25,-38.612 -0.889,-37.973 R6.2 -0.389,-35.941 U5.2
NetC1_1: C1.1 C10.2 D6.2 D8.1
NetC2_1: C2.1 C6.1 D7.2 R1.2
NetCs1_1: Cs1.1 Cs2.1 Cs3.1 Cs4.1 Lt_2.2 | length 12.7
  Top Layer w0.152: Cs1.1 Cs1.1@-18.28,-26.805 ; -15.621,-26.805 -15.564,-26.748
  Top Layer w0.254: -15.564,-26.748 Lt_2.2
  Top Layer w0.381: Cs1.1@-18.28,-26.805 -15.621,-26.805 Cs2.1 Cs3.1 Cs4.1
NetCs1_2: Cs1.2 D1.3
NetCs2_2: Cs2.2 D2.3
NetCs3_2: Cs3.2 D3.3
NetCs4_2: Cs4.2 D4.3
NetCs6_1: Cs6.1 Cs7.1 Cs8.1 Lt.2 | length 11.1
  Bottom Layer w0.381: Cs7.1 -8.51,-24.267 Cs6.1@-5.081,-24.27 ; Cs8.1@-8.51,-24.274 Cs6.1@-5.081,-24.274 ; Cs8.1 Lt.2@-8.51,-23.36
NetCs6_2: Cs6.2 D6.3
NetCs7_2: Cs7.2 D7.3
NetCs8_2: Cs8.2 D8.3
NetCt_1_2: Ct_1.2 Lt_1.1 SW1.5 | length 2.6
  Top Layer w0.152: Lt_1.1 Lt_1.1@-14.556,-21.171
  Top Layer w0.381: Lt_1.1@-14.556,-21.171 Ct_1.2 -13.405,-21.171 -12.889,-21.687 SW1.5
NetCt_2_1: Ct_2.1 Lt_2.1 SW1.8 | length 2.5
  Top Layer w0.152: Ct_2.1@-13.675,-24.084 Ct_2.1 ; SW1.8@-12.711,-23.637 SW1.8
  Top Layer w0.381: Lt_2.1 Ct_2.1@-13.675,-24.084 ; Ct_2.1 -13.151,-24.076 SW1.8@-12.711,-23.637
NetCY1_1: CY1.1 MSP430.46 Y1.2 | length 2.7
  Top Layer w0.152: CY1.1 -5.715,-45.974 Y1.2 -4.625,-44.884 MSP430.46
NetCY2_2: CY2.2 MSP430.45 Y1.1 | length 2.9
  Top Layer w0.152: CY2.2 -4.826,-44.077 Y1.1 ; Y1.1@-4.953,-44.185 -4.86,-44.241 -4.627,-44.384 MSP430.45
NetL1_2: L1.2 U2.20 | length 9
  Bottom Layer w0.254: 3.235,-28.671 U2.20
  Bottom Layer w0.508: L1.2@1.523,-32.766 1.523,-32.385 3.235,-30.673 3.235,-28.671
NetLED1_1: LED1.1 R10.2 | length 0.8
  Top Layer w0.381: R10.2 LED1.1
NetLED2_1: LED2.1 R11.2 | length 0.8
  Top Layer w0.508: LED2.1 R11.2
NetLt_1_2: Lt_1.2 Q2.2 uP1.3 | length 3.6
  Top Layer w0.152: uP1.3@-17.018,-24.13 uP1.3@-16.51,-23.622
  Top Layer w0.254: uP1.3@-16.51,-23.622 -16.51,-22.606 -15.564,-21.66 Lt_1.2
NetMSP430_13: MSP430.13 P2.2 | length 5.4
  Top Layer w0.152: MSP430.13 3.72,-45.884 4.445,-46.609 7.366,-46.609 P2.2
NetMSP430_14: MSP430.14 P2.1 | length 6.9
  Top Layer w0.152: MSP430.14 4.273,-45.384 5.117,-46.228 8.255,-46.228 P2.1
NetMSP430_15: MSP430.15 P1.4 | length 2.4
  Top Layer w0.152: MSP430.15 4.498,-44.884 4.826,-45.212 P1.4
NetMSP430_16: MSP430.16 P1.3 | length 3.7
  Top Layer w0.152: MSP430.16 6.411,-44.384 P1.3@6.985,-44.958
NetR7_2: R7.2 U5.5 U5.6 | length 1.6
  Top Layer w0.152: U5.6 R7.2
  Top Layer w0.381: U5.5 U5.6
NetR8_2: R8.2 U5.3 | length 2.6
  Top Layer w0.152: U5.3 0.262,-36.441 -0.127,-36.83 -0.127,-37.711 R8.2 R8.2@0.381,-38.489
NetR16_1: R16.1 R17.2 U2.11 | length 3.6
  Bottom Layer w0.254: R17.2 -1.39,-20.828 0.007,-20.828 0.585,-21.406 U2.11
NetR17_1: R17.1 R18.2 U2.10 | length 1.7
  Bottom Layer w0.254: -1.083,-22.09 -0.67,-22.503 U2.10
  Bottom Layer w0.381: -1.083,-22.09 R17.1@-1.083,-21.574
NetR18_1: R18.1 R20.1 U2.8 | length 2.6
  Bottom Layer w0.152: R20.1 -2.083,-22.352 R18.1 R18.1@-0.932,-23.503
  Bottom Layer w0.254: R18.1@-0.932,-23.503 U2.8
NetR19_1: R19.1 R20.2 U2.7 | length 2.7
  Bottom Layer w0.152: R20.2 -2.226,-23.368 R19.1 -0.754,-24.376 -0.381,-24.003 U2.7
NetR21_1: R21.1 R22.2 U2.3 | length 7.9
  Bottom Layer w0.152: R22.2 R22.2@-1.837,-26.916 ; R21.1 -1.067,-28.575 1.322,-28.575 1.585,-28.312 U2.3
  Bottom Layer w0.381: R21.1 R22.2@-1.837,-26.916
RF_RX: MSP430.39 U1.1 | length 18.4
  Top Layer w0.152: v3(-13.716,-32.385) -6.909,-39.192 -6.859,-39.192 -4.667,-41.384 MSP430.39
  Bottom Layer w0.152: U1.1 -15.084,-31.017 v3(-13.716,-32.385)
RF_TX: MSP430.33 Q1.3 | length 21.2
  Top Layer w0.152: v3(-4.064,-22.987) -4.064,-27.178 -2.794,-28.448 -2.794,-37.492 -1.25,-39.036 MSP430.33
  Bottom Layer w0.152: Q1.3@-5.842,-23.064 -5.791,-23.012 -3.962,-23.012 -3.937,-22.987 v3(-4.064,-22.987)
  Bottom Layer w0.381: Q1.3@-7.142,-23.064 Q1.3@-5.842,-23.064
RST: MSP430.23 R12.1 SBW1.2 | length 19.4
  Top Layer w0.152: MSP430.23 10.043,-40.884 15.367,-35.56 SBW1.2 19.804,-35.56 R12.1
RX_EN: C5.1 MSP430.38 U1.5 | length 22.7
  Top Layer w0.152: v3(-11.049,-32.385) -11.049,-34.417 -6.134,-39.332 -6.134,-39.342 -5.27,-40.206 -5.26,-40.206 -4.582,-40.884 MSP430.38
  Bottom Layer w0.152: U1.5@-15.113,-26.797 -11.557,-26.797 -11.034,-27.32 -11.034,-32.497 v3@-11.049,-32.512
  Bottom Layer w0.381: U1.5 C5.1@-15.084,-25.713
STAGE1: Cp1.1 Cp2.2 D1.2 D2.1
STAGE2: Cp2.1 Cp3.2 D2.2 D3.1
STAGE3: Cp3.1 Cp4.2 D3.2 D4.1
STAGE4: Cev.1 Cp4.1 D4.2 SW2.2 | length 3.5
  Top Layer w0.152: D4.2 D4.2@-8.103,-30.353
  Top Layer w0.254: Cev.1 -6.221,-30.855 SW2.2@-6.221,-32.157
  Top Layer w0.381: D4.2@-8.103,-30.353 Cev.1
SV: MSP430.32 SV.1 U2.13 U3.3 | length 29.3
  Top Layer w0.152: MSP430.32 -0.75,-39.001 -1.524,-38.227 -1.524,-34.671 0.762,-32.385 v3(4.318,-32.385) 4.318,-22.987 SV.1
  Bottom Layer w0.152: 1.585,-21.529 1.93,-21.184 5.309,-21.184 SV.1 ; U3.3 U3.3@4.318,-31.292
  Bottom Layer w0.254: U2.13 1.585,-21.529 ; v3(4.318,-32.385) U3.3@4.318,-31.292
TB0: 8.1 MSP430.6 | length 29.8
  Top Layer w0.152: 8.1@-6.35,-73.914 -0.25,-67.814 MSP430.6
TB1: 1.1 MSP430.1 | length 18.1
  Top Layer w0.152: 1.1 -10.414,-47.498 -3.175,-47.498 -2.75,-47.073 MSP430.1 ; 1.1@-15.24,-53.594 1.1@-14.097,-53.594
TB2: 2.1 MSP430.4 | length 8.6
  Top Layer w0.152: 2.1@-5.08,-53.594 -5.08,-52.578 -1.25,-48.748 MSP430.4
TB3: 3.1 MSP430.9 | length 8.6
  Top Layer w0.152: MSP430.9 1.25,-48.748 5.08,-52.578 3.1@5.08,-53.594
TB4: *.1 MSP430.12 | length 16
  Top Layer w0.152: MSP430.12 4.401,-48.26 10.922,-48.26 15.24,-52.578 *.1@15.24,-53.594
TB5: 4.1 MSP430.2 | length 27.1
  Top Layer w0.152: 4.1 -11.811,-59.055 -11.811,-50.292 -9.779,-48.26 -2.794,-48.26 -2.25,-47.716 MSP430.2
TB6: 5.1 MSP430.5 | length 19.5
  Top Layer w0.152: 5.1@-6.35,-63.754 -0.75,-58.154 MSP430.5
TB7: 6.1 MSP430.8 | length 19.5
  Top Layer w0.152: 0.75,-58.166 MSP430.8 ; 0.762,-58.166 6.1@6.35,-63.754
TB8: 0.1 MSP430.11 | length 27.3
  Top Layer w0.152: MSP430.11 2.25,-46.997 4.021,-48.768 9.271,-48.768 11.684,-51.181 11.684,-58.928 0.1 ; 0.1@15.24,-63.754 0.1@15.24,-62.611
TB9: 7.1 MSP430.3 | length 37.5
  Top Layer w0.152: 7.1 -16.046,-73.914 -11.176,-69.044 -11.176,-51.054 -9.144,-49.022 -2.667,-49.022 -1.75,-48.105 MSP430.3
TB#: #.1 MSP430.10 | length 36.5
  Top Layer w0.152: MSP430.10 1.75,-47.343 3.556,-49.149 8.89,-49.149 11.049,-51.308 11.049,-68.453 #.1
TB*: 9.1 MSP430.7 | length 29.8
  Top Layer w0.152: MSP430.7 0.25,-67.814 9.1@6.35,-73.914
TBCNTRL1: A.1 MSP430.43 | length 14.2
  Top Layer w0.152: A.1@-16.764,-43.688 A.1 -15.621,-42.545 -5.207,-42.545 -4.368,-43.384 MSP430.43 MSP430.43@-3.527,-43.332
TBCNTRL2: B.1 MSP430.21 | length 12.4
  Top Layer w0.152: MSP430.21 13.69,-41.884 B.1@15.24,-43.434
TEST: MSP430.22 SBW1.3 | length 17.3
  Top Layer w0.152: MSP430.22 10.178,-41.384 14.732,-36.83 SBW1.3
UP/SPK_EN: MSP430.35 SW1.2 SW2.4 | length 25
  Top Layer w0.152: SW2.4@-6.871,-33.907 -6.871,-35.039 -5.842,-36.068 -3.455,-36.068 ; SW1.2 -7.112,-22.987 -7.533,-23.408 -7.533,-25.868 -5.334,-28.067 -4.445,-28.067 -3.455,-29.057 -3.455,-37.693 -2.286,-38.862 MSP430.35@-2.286,-39.659
UP_OUT: MSP430.17 P1.2 | length 5.3
  Top Layer w0.152: MSP430.17 7.308,-43.884 8.255,-44.831 P1.2@8.255,-44.958
UPLINK_SR: Q2.3 UPLINK_SECURITY.1 | length 16.1
  Top Layer w0.152: UPLINK_SECURITY.1@-19.558,-34.544 -20.822,-33.28 -20.822,-22.86 -19.806,-21.844 -18.619,-21.844
  Top Layer w0.254: Q2.3@-18.619,-22.635 -18.619,-21.844 Q2.3@-18.619,-21.335
VBAT: C12.2 U2.18 | length 1.7
  Bottom Layer w0.152: C12.2@4.751,-23.503 C12.2
  Bottom Layer w0.254: U2.18 C12.2@4.751,-23.503
VDD_UP: MSP430.18 P1.1 | length 6.7
  Top Layer w0.152: MSP430.18 7.951,-43.384 P1.1@9.525,-44.958
VMEAS: MSP430.19 R8.1 R9.2 | length 10.7
  Top Layer w0.152: R8.1 3.683,-38.354 v3(5.08,-39.751) ; R9.2@1.516,-37.473 R9.2 ; MSP430.19 3.517,-42.926 4.191,-42.926 4.192,-42.927 5.46,-42.927 v3(5.842,-42.545)
  Top Layer w0.381: R8.1 R9.2@1.516,-37.473
  Bottom Layer w0.152: v3(5.08,-39.751) 5.842,-40.513 v3(5.842,-42.545)
VRECT: C10.1 C24.2 C25.2 D8.2 L1.1 U2.2 Vrect.2 | length 25.4
  Bottom Layer w0.152: C25.2 C24.2
  Bottom Layer w0.254: 2.085,-28.71 U2.2
  Bottom Layer w0.508: L1.1@1.391,-29.405 2.085,-28.71
  Bottom Layer w0.635: Vrect.2@-16.637,-34.544 -11.431,-34.544 -9.018,-32.131 ; -10.16,-30.987 -10.16,-29.845 -10.034,-29.719 -10.034,-29.083 ; -10.034,-31.115 -9.018,-32.131 ; L1.1@-1.893,-29.702 -4.321,-32.131 -9.018,-32.131
VREF_SAMP: C26.2 R24.1 R25.2 U2.4 | length 2.7
  Bottom Layer w0.152: R24.1 R25.2 1.085,-26.772 U2.4
VREG: C8.2 C11.2 MSP430.37 MSP430.48 R12.2 SBW1.4 T3.1 U3.5 | length 16.2
  Top Layer w0.152: v2(-4.445,-46.736) v2@-4.327,-46.736 ; SBW1.4 19.55,-38.1 R12.2
  Top Layer w0.254: C11.2@-4.291,-39.532 MSP430.37@-3.566,-40.257
  Top Layer w0.635: v2@-5.37,-39.08 -4.953,-39.497 C11.2@-4.318,-39.497 ; v2@-4.327,-46.736 -3.692,-46.101 -3.429,-46.101
  Bottom Layer w0.152: T3.1@9.017,-28.194 T3.1 10.414,-28.575
  Bottom Layer w0.381: U3.5 6.274,-28.948 9.025,-28.948 T3.1 ; T3.1@9.017,-28.194 v3(9.017,-26.162)
  Bottom Layer w0.508: T3.1 10.668,-27.305 v3(10.668,-26.162) ; 10.414,-28.575 v3(11.303,-28.575)
  other v2: -5.334,-39.116
VSIG: C6.2 R1.1 R2.2 T1.1 U1.3 | length 12.2
  Bottom Layer w0.152: T1.1 T1.1@-18.805,-28.127 ; R1.1@-12.074,-30.742 R1.1
  Bottom Layer w0.254: U1.3 -16.394,-28.521 -16.394,-28.116 -15.838,-27.559 -14.859,-27.559 -14.224,-28.194 -14.224,-30.622 -13.452,-31.394 -12.712,-31.394 R1.1@-12.074,-30.756 ; R1.1@-12.065,-30.747 R1.1@-12.065,-30.48
  Bottom Layer w0.381: R2.2 -16.889,-28.511 U1.3
  Bottom Layer w0.508: R1.1@-12.074,-30.756 C6.2
  Bottom Layer w0.635: T1.1@-18.805,-28.127 R2.2
VSTORE: C21.2 C22.2 C27.2 R7.1 R21.2 R24.2 SW2.6 T4.1 U2.19 U3.1 U3.4 U5.4 | length 40.2
  Top Layer w0.152: v3(-5.588,-35.306) -5.588,-33.924 SW2.6@-5.571,-33.907 ; v5(-2.159,-35.306) -2.159,-34.036 -0.956,-32.833 v3(-0.956,-26.916) ; U5.4 R7.1@2.667,-36.441 ; R7.1 6.612,-36.441 v3(7.747,-35.306) v2(7.747,-31.242)
  Bottom Layer w0.152: v3(-5.588,-35.306) v3(7.747,-35.306) v3@7.62,-35.433 ; R21.2@-0.956,-27.686 R21.2
  Bottom Layer w0.254: R21.2@-0.956,-27.686 v3(-0.956,-26.916) ; U2.19 4.648,-24.003 C22.2
  Bottom Layer w0.508: U3.4 6.217,-30.791 U3.1
pads on no net: MSP430.20 MSP430.25 MSP430.26 MSP430.27 MSP430.28 MSP430.29 MSP430.30 MSP430.42 SPK1.1 SPK1.4 SW2.5 TF1.2 TF1.5 U2.12 U2.14 U2.16 Y1.

## Polygon pours and split planes (outlines as drawn)
GND on Top Layer "Top-layer-GND" (hatched 90Degree grid 0.508 track 0.203, pour order 8): -21.241,-76.459 -21.209,-76.422 -21.209,-32.385 21.177,-32.385 21.177,-76.311 21.177,-76.607 21.177,-76.755 21.177,-77.198 19.521,-79.121 -18.821,-79.121 -18.948,-79.121 -21.241,-76.459
GND on Bottom Layer "Bottom-layer-GND" (solid, pour order 7): -21.219,-75.682 -21.187,-75.634 -21.187,-18.74 21.261,-18.74 21.261,-75.491 21.261,-75.873 21.261,-76.064 21.261,-76.637 19.603,-79.121 -18.795,-79.121 -18.923,-79.121 -21.219,-75.682
VREG on Mid-Layer 1 "Mid-layer-Vreg" (solid, pour order 11): -6.35,-39.04 -6.35,-25.146 -6.199,-25.309 20.701,-25.309 20.701,-39.04 -6.35,-39.04
VREG on Mid-Layer 1 "Mid-layer-Vreg" (solid, pour order 12): -6.35,-47.625 -6.35,-38.1 -6.334,-38.212 -3.556,-38.212 -3.556,-47.625 -6.35,-47.625
GND on Mid-Layer 2 "Mid-layer-Gnd" (solid, pour order 9): -11.049,-48.895 -11.049,-38.1 -10.922,-38.227 11.684,-38.227 11.684,-48.895 -11.049,-48.895
GND on Mid-Layer 2 "Mid-layer-Gnd" (solid, pour order 10): -21.336,-39.04 -21.336,-18.415 -21.095,-18.658 21.717,-18.658 21.717,-39.04 -21.336,-39.04

## Keep-outs
Keep-Out Layer:
  lines w0.254: 21.344,-163.949 ccw(c21.344,-161.29) 24.003,-161.29 ; -21.177,-75.746 ccw(c-17.858,-75.746) -17.858,-79.065 19.05,-79.065 ccw(c19.05,-75.838) 22.277,-75.838 22.277,-0.433 21.971,-0.127 -20.701,-0.127 -21.177,-0.603 -21.177,-75.746

## Other copper
Top Layer:
  rectangle net NetCs4_2: -9.398,-28.194 -8.001,-27.559
  rectangle net NetCs3_2: -12.827,-28.194 -11.43,-27.559
  rectangle net NetCs2_2: -16.002,-28.194 -14.605,-27.559
  rectangle net NetCs1_2: -19.304,-28.194 -17.907,-27.559
  rectangle net GND: -20.32,-31.75 -19.304,-29.845
  rectangle net STAGE4: -8.89,-31.75 -7.874,-29.845
  rectangle net STAGE3: -12.192,-31.75 -9.398,-29.845
  rectangle net STAGE2: -15.494,-31.75 -12.7,-29.845
  rectangle net STAGE1: -18.796,-31.75 -16.002,-29.845
  region net GND: -20.447,-23.495 -20.447,-24.765 -17.653,-24.765 -17.653,-23.495
  rectangle net GND: -13.843,-23.241 -11.508,-22.179
Bottom Layer:
  region net VSTORE: 5.14,-25.908 3.937,-25.908 3.937,-29.337 5.14,-29.337
  rectangle net GND: -8.891,-31.115 -4.573,-29.845
  region net VSTORE: 9.271,-30.861 5.969,-30.861 5.969,-31.75 9.271,-31.75
  region net GND: 6.283,-22.987 5.648,-22.987 5.648,-25.011 6.283,-25.011
  region net GND: 7.045,-24.503 5.648,-24.503 5.648,-27.678 7.045,-27.678
  region net GND: 0.568,-24.503 -0.194,-24.503 -0.194,-25.392 0.568,-25.392
  region net VSTORE: 0.187,-27.551 -1.083,-27.551 -1.083,-28.059 0.187,-28.059
  region net GND: 0.187,-24.503 -0.321,-24.503 -0.321,-27.17 0.187,-27.17
  rectangle net NetC2_1: -13.336,-31.115 -12.828,-28.702
  region net VSTORE: 5.14,-24.003 4.505,-24.003 4.505,-25.265 5.14,-25.265
  region net VREF_SAMP: 1.203,-25.773 0.695,-25.773 0.695,-28.059 1.203,-28.059
  region net VSTORE: 5.14,-24.63 3.743,-24.63 3.743,-27.805 5.14,-27.805
  rectangle net GND: -9.018,-31.115 -8.51,-29.845
  rectangle net VRECT: -10.542,-31.115 -9.526,-27.432
  rectangle net NetCs7_2: -12.828,-25.527 -11.558,-25.019
  rectangle net GND: -5.589,-31.115 -4.573,-27.432
  rectangle net NetC2_1: -13.844,-29.337 -12.828,-27.432
  rectangle net GND: -12.32,-29.337 -11.304,-27.432
  rectangle net NetCs6_2: -6.224,-25.527 -4.827,-25.019
  rectangle net NetCs8_2: -9.526,-25.527 -8.256,-25.019
  rectangle net NetC1_1: -9.018,-29.337 -6.097,-27.432

## Silkscreen, mask and mechanical layers (free items; w line width, h text height)
Top Overlay:
  text "UW Battery-free Cellphone" at -18.669,-16.637 h1.91
  text "Tag #" at -1.651,-25.4 h1.91
Bottom Overlay:
  text "Revision 4.0" at 8.001,-61.214 h1.91
  text "Battery-free Cellphone" at 16.129,-64.135 h1.91
  text "Sensor Systems Group, UW" at 19.304,-67.564 h1.91